# Altium PCB STM32F407_board.PcbDoc (part 2 of 3)
Units mm, origin at the board's own origin, x right, y up, seen from the top; angles counter-clockwise.
Board outline 72.6 x 74.6 mm, 4 copper layers (Top Layer, GND, PWR, Bottom Layer), stack 1.564 mm thick; 188 components, 143 nets, 738 pads, 406 vias.
Unrouted connection lines stored in the file: 4.
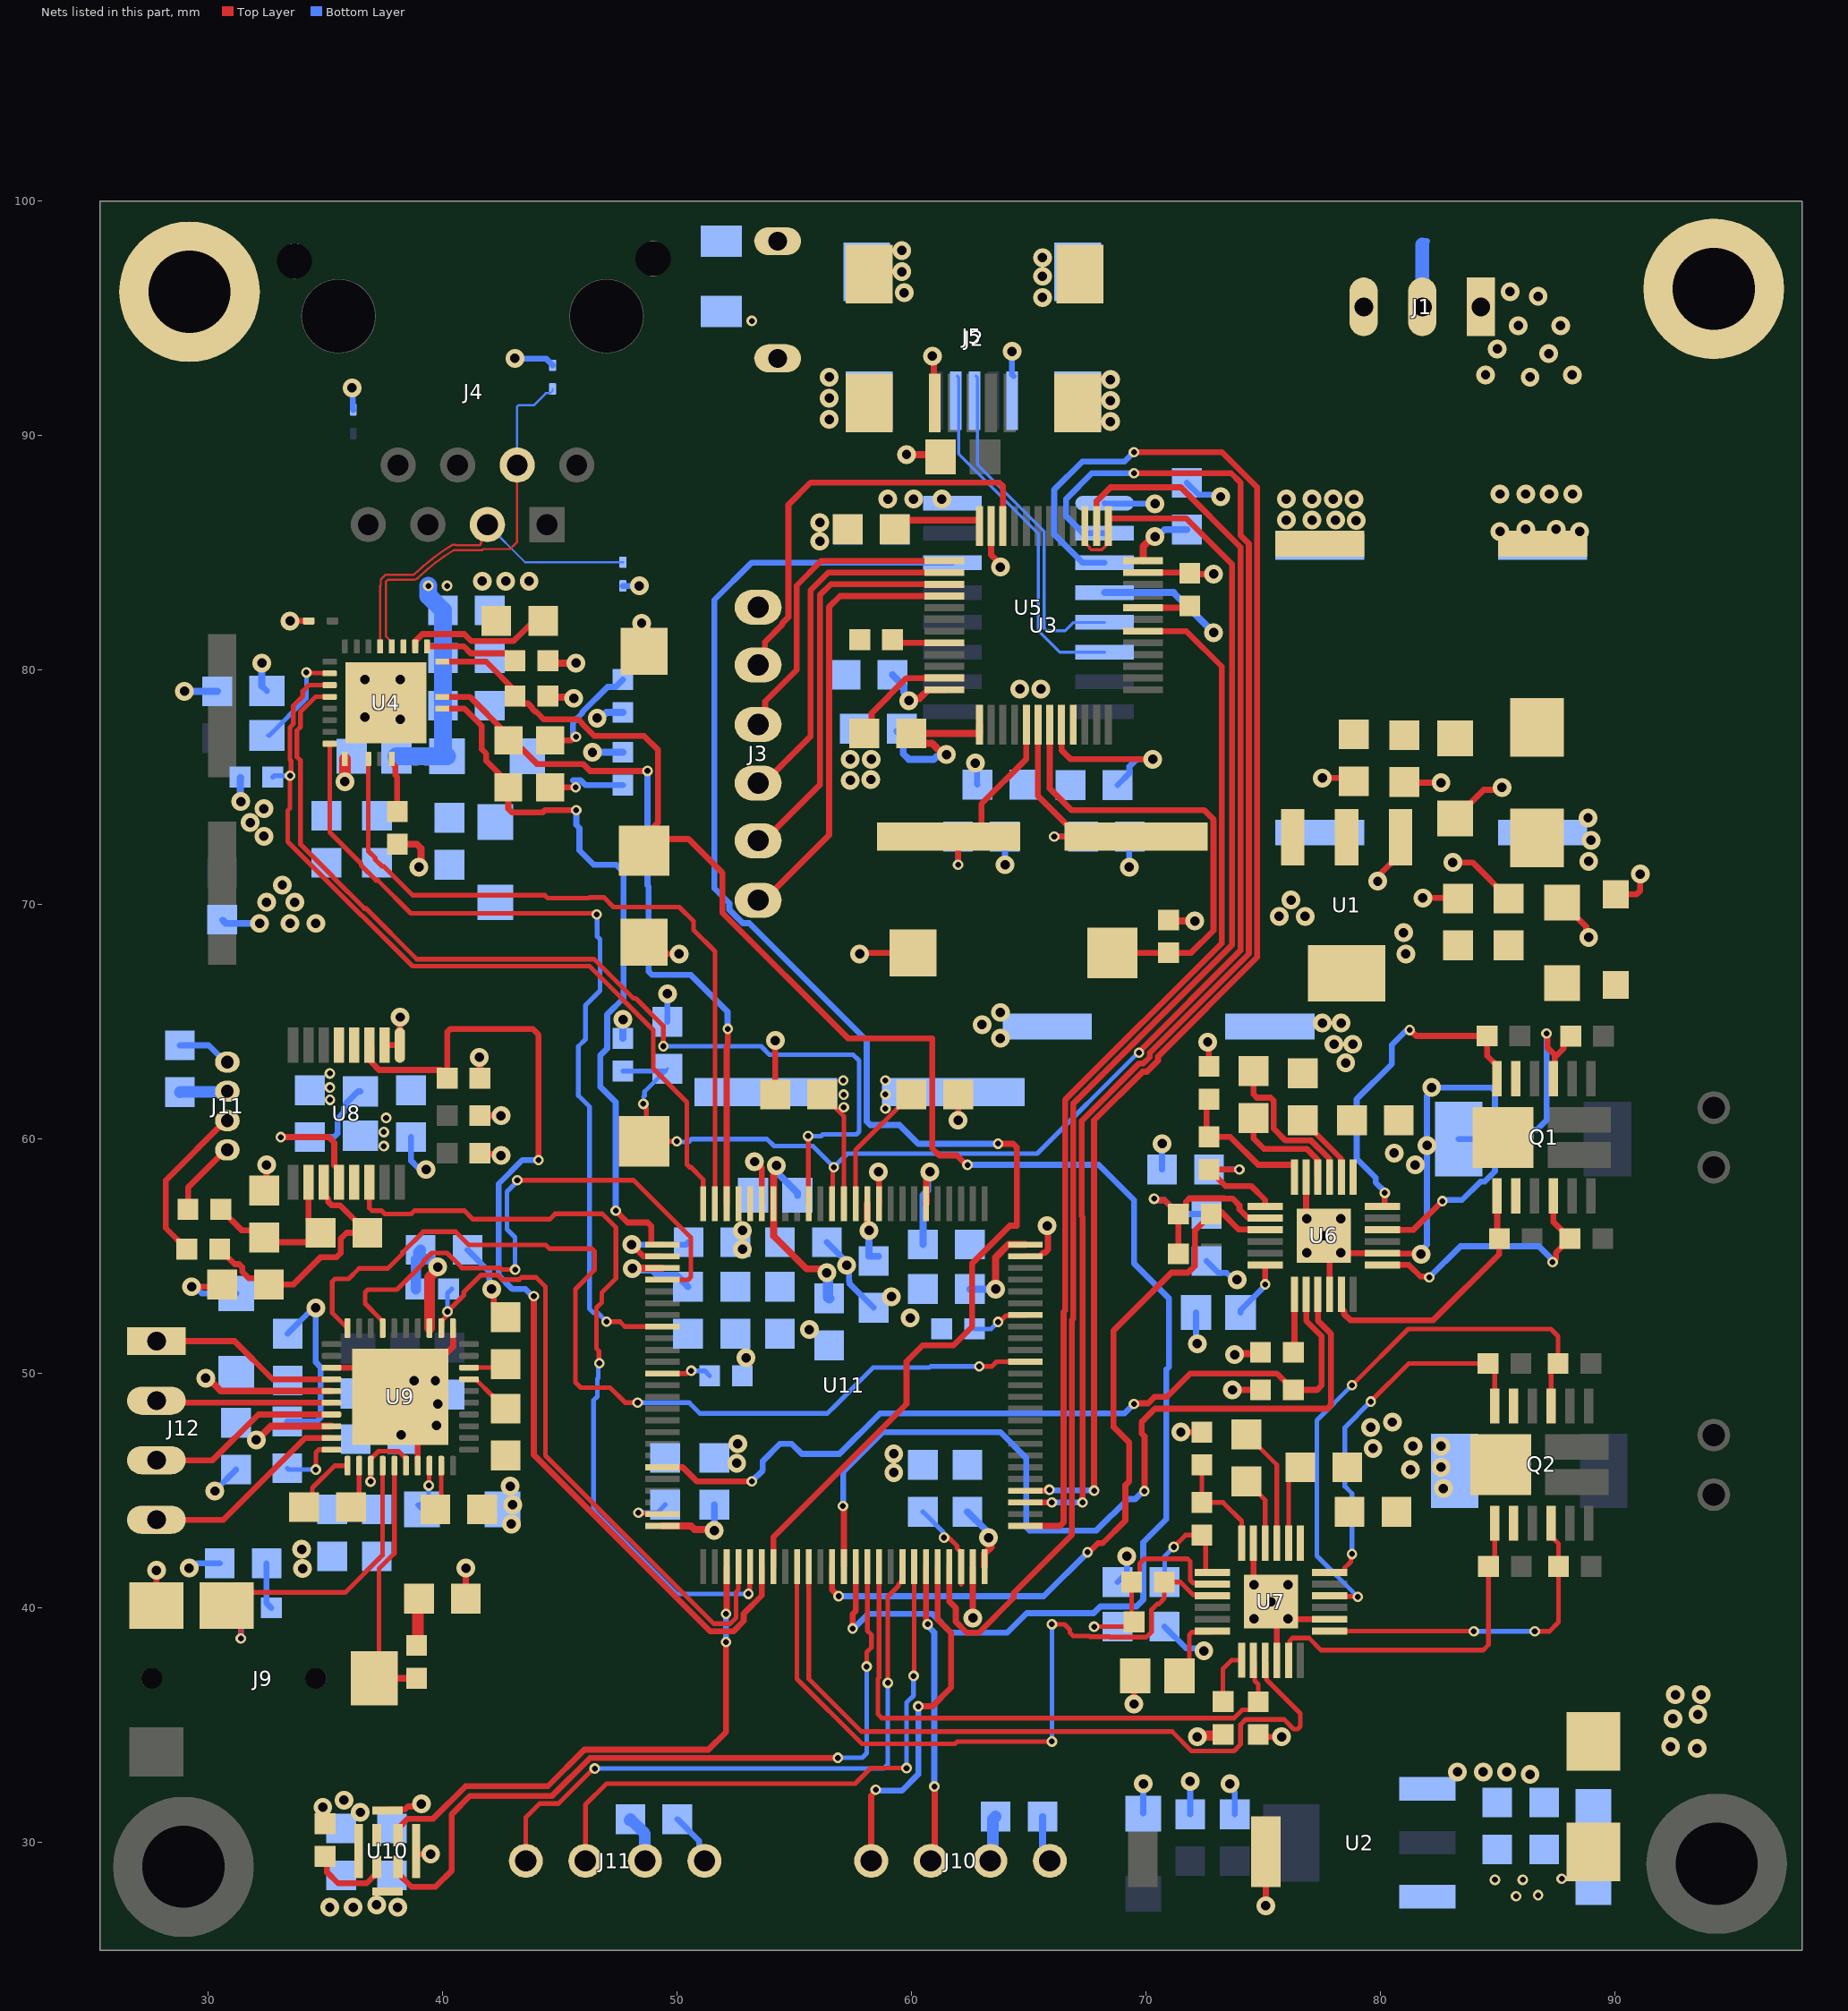
[diagram p4: the nets of this part, all layers, seen from the top]

## Via types
v1: diameter 0.8, hole 0.4, Top Layer to Bottom Layer, 257 vias
v2: diameter 0.45, hole 0.25, Top Layer to Bottom Layer, 149 vias

## Nets (pads, with @x,y where several pads share a name; then routed paths per layer and width w, separated by ;. In a path a pad name is that pad's centre, name@x,y a point inside that pad or via, vN(x,y) a via of type N, cw(c..) or ccw(c..) an arc to the next point about the centre after c; other vN are vias at no path point) (continued)
+3V3: C4.2 C5.2 C6.2 C16.2 C17.2 C19.2 C20.2 C22.2 C23.2 C24.2 C31.2 C32.2 C33.2 C34.2 C37.2 C46.2 C50.2 C65.2 C66.2 C67.2 C68.2 C69.2 C70.2 C78.2 C79.2 C80.2 C81.2 C82.2 C83.2 C90.2 C91.2 C92.2 D2.K FB1.1 FB2.1 FB4.1 J10.3 J11.3 R2.2 R4.2 R7.1 R8.2 R9.2 R12.2 R23.1 R35.1 R37.2 R38.2 R39.2 R42.2 R45.2 R47.2 U1.2 U1.4 U3.1 U3.9 U3.24 U3.36 U3.48 U4.17 U5.4 U5.16 U8.13 U9.5 U9.8 U9.33 U10.1 U11.6 U11.11 U11.19 U11.28 U11.50 U11.75 U11.100 | length 88.6
  Top Layer w0.125: C20.2@59.291,86.011 C20.2@59.68,86.4 ; U3.36@62.822,86.4 62.909,86.313 U3.36@62.909,86.153 ; v1@70.313,85.7 v1(70.4,85.7) ; R4.2@70.981,69.342 R4.2@71.023,69.3
  Top Layer w0.3: v1(29.9,49.8) 30.002,49.8 30.552,49.25 U9.5@35.265,49.25 ; v1(32.064,47.17) 32.106,47.17 32.686,47.75 U9.8@35.265,47.75 ; R8.2@38.075,72.577 38.908,72.577 39.084,72.401 39.084,71.684 v1(39,71.6) ; R37.2@41.599,59.4 41.649,59.35 42.45,59.35 v1(42.5,59.3) ; R39.2@41.599,62.6 v1@41.599,63.499 ; R38.2@41.799,61 v1(42.5,61) ; R9.2@44.499,80.4 44.599,80.3 v1(45.7,80.3) ; R7.1@44.528,79.1 44.778,78.85 45.55,78.85 v1(45.6,78.8) ; v1(48.1,54.479) 48.11,54.49 49.379,54.49 U11.28@49.389,54.5 ; U11.50@49.389,43.5 50.6,43.5 50.75,43.35 51.55,43.35 v1(51.6,43.3) ; v1(54.247,58.867) 54.247,58.732 54.127,58.612 54.127,55.873 55.535,54.465 v1@56.4,54.465 ; U11.11@58.127,57.238 58.127,56.173 v1(58.2,56.1) ; C20.2@59.68,86.4 U3.36@62.822,86.4 ; v1(59.8,89.2) R2.2@61.3,89.2 ; v1(59.9,78.7) 59.996,78.796 60.352,78.796 60.721,79.165 U3.48@61.421,79.165 ; C19.2@60,77.3 C19.2@60.1,77.3 ; C19.2@60,77.4 C19.2@60.1,77.3 ; U11.6@60.627,57.238 60.65,57.261 60.65,58.315 60.8,58.465 v1(60.8,58.6) ; v1(61.5,76.4) 61.365,76.4 60.885,76.879 60.485,76.879 60.3,77.064 C19.2@60.3,77.3 ; U3.1@62.909,77.677 62.909,77.3 C19.2@60.3,77.3 ; U11.75@63.127,41.762 63.127,42.327 63.404,42.604 63.404,42.904 v1@63.5,43 ; v1(63.6,53.6) 63.6,54.953 64.147,55.5 U11.100@64.865,55.5 ; U3.24@69.897,84.665 69.897,85.284 v1@70.313,85.7 ; R4.2@71.023,69.3 v1(72.1,69.3) ; v1(73.8,50.8) 73.85,50.85 74.852,50.85 R23.1@74.902,50.9 ; C19.2@60.1,77.3 C19.2@60.3,77.3
  Top Layer w0.45: U9.33@39.45,51.935 39.45,54.099 39.8,54.449 v1(39.8,54.544) ; v1(72.2,34.5) 72.252,34.552 73.249,34.552 R35.1@73.3,34.603
  Top Layer w0.5: v1(35.842,75.242) U4.17@35.842,76.213
  Bottom Layer w0.254: R12.2@31.369,75.438 R12.2@31.4,75.407
  Bottom Layer w0.3: v1(31.4,74.4) 31.385,74.416 31.385,75.392 R12.2@31.4,75.407 ; R47.2@47.701,64.299 v1@47.701,65.101 ; v1(48.1,54.479) 48.161,54.418 48.95,54.418 49.183,54.185 49.992,54.185 C82.2@50.477,53.7 ; v1(51.6,43.3) C81.2@51.6,44.4 ; v1(54.247,58.867) 54.343,58.771 54.343,58.507 55.15,57.7 FB4.1@55.15,57.6 ; v1(58.2,56.1) 58.2,55 C83.2@58.6,55 ; C16.2@59.2,79.8 59.685,79.315 59.685,79.05 59.9,78.835 v1(59.9,78.7) ; C17.2@59.4,77.4 59.657,77.143 59.657,76.438 59.895,76.2 60.965,76.2 61.069,76.304 61.269,76.304 61.3,76.335 v1@61.3,76.4 ; C92.2@60.5,55.5 60.5,57.6 60.704,57.804 60.704,58.504 v1(60.8,58.6) ; C79.2@62.4,44.1 63.204,43.296 63.204,43.096 v1(63.3,43) ; C78.2@62.5,53.6 v1(63.6,53.6) ; U5.4@68.25,83.31 71.19,83.31 v1(72.9,81.6) ; v1(70.4,85.7) 70.512,85.7 70.807,85.995 C24.2@71.755,85.995
  Bottom Layer w0.45: R42.2@38.87,53.6 38.872,53.602 38.872,54.861 39.011,55 39.117,55 39.256,54.861 39.483,54.861 v1(39.8,54.544) ; C70.2@38.972,55.169 C70.2@39.073,55.271 ; v1(56.4,54.3) 56.45,54.25 56.45,53.25 C80.2@56.5,53.2
  Bottom Layer w0.5: C46.2@28.8,62 28.817,62.017 30.808,62.017 J11.3@30.826,62.034 ; C91.2@47.978,30.944 C91.2@48.022,30.988 48.641,30.369 J11.3@48.641,29.21 ; J10.3@63.373,29.21 63.486,29.323 63.486,30.987 C90.2@63.6,31.1
  other v1: 36.5,31.281 34.9,31.5 35.8,31.8 41.574,63.488 47.701,65.101 81.1,67.9 81,68.8 32.385,72.914 31.8,73.5 32.385,74.09 64.632,79.2 65.532,79.2 59,87.3 60.1,87.3 61.3,87.3
  other v2: 37.5,59.7 37.5,60.3 37.6,60.9
+12V: C1.1 C2.1 C3.1 C39.1 C40.1 C41.2 C45.1 C47.2 D1.A D3.A J1.1 Q1.2 Q1.11 Q1.15 Q2.2 Q2.11 Q2.15 U6.1 U7.1
  other v1: 93.527,34.008 92.393,34.078 92.493,35.278 93.557,35.454 92.6,36.3 93.7,36.3 79.7,46.8 79.6,47.7 80.523,47.926 78.535,63.245 78.035,64.045 78.835,64.045 77.535,64.945 78.335,64.945 88.9,71.846 89,72.746 88.871,73.703 85.114,85.914 88.514,85.914 86.214,86.014 87.514,86.014 85.114,87.514 86.214,87.514 87.214,87.514 88.214,87.514 86.4,92.5 84.5,92.6 88.2,92.6 87.2,93.5 85,93.7 85.9,94.7 87.7,94.7 86.743,95.945 85.543,96.145
AIN0: J11.2@30.826,60.784 R40.2 | length 7.1
  Top Layer w0.254: R40.2@29.101,55.3 28.2,56.201 28.2,58.234 30.751,60.784 J11.2@30.826,60.784
  Bottom Layer w0.254: J11.2@30.826,60.693 J11.2@30.826,60.784
AIN1: J11.1@30.826,59.534 R41.2 | length 3.3
  Top Layer w0.254: R41.2@29.148,57 29.148,57.931 30.751,59.534 J11.1@30.826,59.534
  Bottom Layer w0.254: J11.1@30.751,59.534 J11.1@30.826,59.534
CAN_RX: J10.2 U11.70 | length 12.7
  Top Layer w0.254: U11.70@60.627,41.762 60.627,39.426 60.7,39.353 v2(60.7,39.3) ; J10.2@60.833,29.21 61,29.377 v2@61,32.343
  Bottom Layer w0.254: v2(60.7,39.3) 60.7,39.247 60.986,38.961 v2(60.986,32.386)
CAN_TX: J10.1 U11.71 | length 15.3
  Top Layer w0.254: J10.1@58.293,29.21 58.293,31.997 58.486,32.19 v2(58.486,32.243) ; v2(60.3,35.8) 60.306,35.806 60.906,35.806 61.7,36.6 61.7,38.939 61.127,39.512 U11.71@61.127,41.762
  Bottom Layer w0.254: v2@58.486,32.214 v2(58.486,32.243) ; v2@58.5,32.2 59.6,32.2 60.3,32.9 v2(60.3,35.8)
CH340_RST: U5.14 U11.57 | length 65.9
  Top Layer w0.254: U11.57@54.127,41.762 54.127,43.027 59.8,48.7 59.8,50.514 60.486,51.2 61.8,51.2 62.6,52 62.6,54.7 64.206,56.306 64.5,56.306 64.5,59.651 64.351,59.8 v2(63.7,59.8)
  Bottom Layer w0.254: U5.14@61.75,84.58 53.18,84.58 51.6,83 51.6,70.7 52.24,70.06 52.24,69.779 52.812,69.207 53.093,69.207 58.1,64.2 58.1,60.749 58.249,60.6 59.5,60.6 60.3,59.8 v2(63.7,59.8)
CH340_RXD: U5.3 U11.79 | length 63.2
  Top Layer w0.254: U11.79@64.865,45 65.8,45 65.839,45.039 v2(65.892,45.039) ; v2(67.8,45) 67.8,60.799 69.876,62.874 70.053,62.874 70.526,63.347 70.526,63.524 74.754,67.753 74.754,87.798 73.252,89.3 v2(69.5,89.3)
  Bottom Layer w0.254: v2(65.892,45.039) 65.912,45.02 67.78,45.02 v2(67.8,45) ; U5.3@68.25,84.58 67.318,84.58 66.1,85.798 66.1,87.7 67.3,88.9 69.1,88.9 v2(69.5,89.3)
CH340_TXD: U5.2 U11.78 | length 59.9
  Top Layer w0.254: U11.78@64.865,44.5 v2(66,44.5) ; v2(67.306,44.5) 67.306,56.68 67.27,56.715 67.27,60.77 69.729,63.228 69.907,63.228 70.172,63.493 70.172,63.671 74.4,67.899 74.4,85.401 74.046,85.755 74.046,88.005 73.651,88.4 v2(69.5,88.4)
  Bottom Layer w0.254: v2(66,44.5) v2(67.306,44.5) ; U5.2@68.25,85.85 67.318,85.85 66.608,86.56 66.608,87.308 67.7,88.4 v2(69.5,88.4)
CH340USB_D_N: J5.2 U5.6 | length 15.5
  Bottom Layer w0.125: J5.2@61.966,92.544 62.029,92.481 62.029,89.215 65.422,85.822 65.422,81.678 66.33,80.77 U5.6@68.25,80.77
CH340USB_D_P: J5.3 U5.5 | length 14.7
  Bottom Layer w0.125: J5.3@62.766,92.544 62.829,92.481 62.829,88.771 65.674,85.926 65.674,81.783 65.778,81.678 66.576,81.678 66.937,82.04 U5.5@68.25,82.04
CLK_MIC: U10.3 U11.65 | length 32.3
  Top Layer w0.2: v2(58.1,37.5) 58.1,38.112 58.3,38.312 58.3,38.857 58.127,39.03 U11.65@58.127,41.762
  Top Layer w0.254: U10.3@38.1,28.956 38.1,28.681 38.681,28.1 39.7,28.1 40.4,28.8 40.4,31.2 41.181,31.981 44.683,31.981 46.302,33.6 v2@56.8,33.6
  Bottom Layer w0.2: v2(56.873,33.605) 57.905,33.605 58.1,33.8 v2(58.1,37.5)
COL: DS1.A U4.28 U11.26 | length 31
  Top Layer w0.254: U4.28@39.992,78.363 40.937,78.363 41.675,77.625 41.675,76.628 41.864,76.439 41.864,76.136 DS1.A@42.7,75.3 ; DS1.A@42.811,75 42.811,74.089 42.973,73.927 44.266,73.927 44.364,74.025 v2(45.711,74.025) ; v2(47.395,56.946) 47.901,56.44 48.759,56.44 48.908,56.291 48.908,55.5 U11.26@49.389,55.5
  Bottom Layer w0.254: v2@45.6,74 45.625,74.025 v2(45.711,74.025) ; v2@45.641,73.966 45.679,73.966 45.711,73.934 45.711,73.403 45.847,73.267 45.847,72.312 46.46,71.7 47.418,71.7 47.727,71.391 47.727,66.014 47.029,65.315 47.029,63.864 46.729,63.564 46.729,62.239 47.395,61.572 v2(47.395,56.946)
CRS: DS2.A U4.29 U11.23 | length 30.9
  Top Layer w0.254: U4.29@39.992,78.863 41.165,78.863 42.69,77.338 44.028,76 46,76 46.3,75.7 v2(48.748,75.7) ; U11.23@52.127,57.238 52.127,63.967 52.175,64.015 v2(52.175,64.7)
  Bottom Layer w0.254: v2(48.748,75.7) 48.748,70.822 48.8,70.77 48.8,67.149 48.949,67 50.6,67 52.167,65.433 52.167,64.708 v2(52.175,64.7)
DOUT_MIC: U10.4 U11.53 | length 23.1
  Top Layer w0.254: U10.4@38.1,30.306 38.1,30.581 38.527,31.008 39.608,31.008 41,32.4 44.5,32.4 46.054,33.954 51.35,33.954 52.1,34.704 v2(52.1,38.546) ; v2(52.1,39.75) 52.127,39.777 U11.53@52.127,41.762
  Bottom Layer w0.254: v2(52.1,38.546) v2(52.1,39.75)
DRDY: U8.14 U11.55 | length 34.1
  Top Layer w0.2: U8.14@36.886,58.155 36.886,57.062 37.003,56.944 37.409,56.944 37.548,56.805 38.667,56.805 38.806,56.944 40.941,56.944 41.307,56.578 44.577,56.578 44.809,56.811 46.821,56.811 47.4,56.231 47.4,54.053 46.8,53.453 46.8,53.034 46.575,52.809 46.575,51.067 46.679,50.963 46.679,50.458 v2(46.7,50.438) ; v2(53.051,40.6) 53.051,40.668 53.108,40.724 53.108,41.743 U11.55@53.127,41.762
  Bottom Layer w0.2: v2(46.7,50.438) 46.652,50.39 46.652,49.81 46.615,49.772 46.615,49.019 46.45,48.854 46.45,44.15 50,40.6 v2(53.051,40.6)
DVDD: C43.2 R21.2 R22.2 U6.8 | length 9.9
  Top Layer w0.254: v2@70.4,57.5 70.504,57.396 70.806,57.396 R21.2@71.401,56.8 ; R22.2@71.401,55.249 R21.2@71.401,56.8 ; U6.8@75.097,56.63 75.074,56.653 74.353,56.653 74.003,57.002 74.003,57.169 73.712,57.46 73.348,57.46 73.337,57.472 71.868,57.472 71.719,57.323 71.719,57.118 R21.2@71.401,56.8
  Bottom Layer w0.254: v2@70.4,57.5 70.504,57.396 70.806,57.396 71.401,56.8 C43.2@72.6,56.8
  other v2: 70.358,57.453
DVDD_2: C49.2 R33.2 R34.2 U7.8 | length 9.6
  Top Layer w0.2: v2(67.8,39.2) 69.301,39.2 R34.2@69.501,39.4 69.401,39.5 R33.2@69.401,41.1 69.746,41.444 69.746,41.897 69.946,42.098 71.781,42.098 71.898,41.981 71.898,41.184 72.015,41.067 72.798,41.067 U7.8@72.848,41.017
  Bottom Layer w0.2: v2(67.8,39.2) C49.2@68.8,39.2
EARTH_GND: C25.1 J1.2 MH1.1 MH2.1 R10.1 | length 2.9
  Bottom Layer w0.254: 81.8,98.151 81.949,98.3 82,98.3
  Bottom Layer w0.6: J1.2@81.8,95.5 81.8,98.151
EN: R24.2 U6.14 U11.45 | length 35.4
  Top Layer w0.254: U11.45@49.389,46 50.251,46 50.851,45.4 v2(53.2,45.4) ; v2(69.5,48.7) 69.529,48.729 70.106,48.729 70.377,49 70.9,49 71.899,49.999 75.6,49.999 R24.2@76.299,49.3 77.321,49.3 77.5,49.479 77.5,51.6 76.855,52.245 76.855,53.368 U6.14@76.847,53.376
  Bottom Layer w0.254: v2(53.2,45.4) 53.669,45.869 53.669,46.269 54.4,47 54.9,47 55.332,46.568 56.943,46.568 58.675,48.3 69.1,48.3 v2(69.5,48.7)
EN_2: R36.2 U7.14 U11.66 | length 24.7
  Top Layer w0.2: U11.66@58.627,41.762 58.627,37.028 58.575,36.976 58.575,35.469 58.744,35.3 73.772,35.3 74.126,35.654 74.456,35.654 R36.2@74.8,35.999 74.8,36.743 74.648,36.895 74.648,37.713 U7.14@74.598,37.763
EXT_UART_RX: J11.2@46.101,29.21 U11.69 | length 25.5
  Top Layer w0.2: J11.2@46.101,29.21 46.101,31.601 47,32.5 57.6,32.5 58.269,33.169 v2(59.8,33.169) ; v2(60.1,37.1) 60.127,37.127 U11.69@60.127,41.762
  Bottom Layer w0.2: v2(59.8,33.169) 59.8,35.966 60.1,36.266 v2(60.1,37.1)
EXT_UART_TX: J11.1@43.561,29.21 U11.68 | length 26.9
  Top Layer w0.2: J11.1@43.561,29.21 43.561,31.061 44.154,31.654 44.954,31.654 46.448,33.148 v2(46.5,33.148) ; v2(59,36.8) 59,40.488 59.454,40.942 59.454,41.007 59.571,41.124 59.6,41.124 59.627,41.151 U11.68@59.627,41.762
  Bottom Layer w0.2: v2(46.5,33.148) 58.831,33.148 59,33.317 v2(59,36.8)
GH1: Q1.1 R15.2 U6.17 | length 11.3
  Top Layer w0.254: U6.17@78.347,53.376 78.347,52.776 78.47,52.653 78.47,52.532 78.729,52.273 82.273,52.273 85.076,55.076 85.076,55.739 R15.2@85.09,55.753 84.995,55.848 Q1.1@84.995,57.571
GH1_2: Q2.1 R27.2 U7.17 | length 15
  Top Layer w0.2: U7.17@76.098,37.763 76.148,37.813 76.148,38.596 76.265,38.713 76.969,38.713 77.482,38.2 84.4,38.2 84.626,38.426 R27.2@84.626,41.771 84.626,41.826 84.892,42.092 Q2.1@84.892,43.613
GH2: Q1.12 R16.2 U6.24 | length 14.5
  Top Layer w0.254: U6.24@80.097,57.13 80.177,57.13 80.2,57.153 v2(80.2,57.7) ; v2@81.2,64.6 81.348,64.6 81.548,64.4 R16.2@84.565,64.4 84.565,63.551 84.995,63.121 Q1.12@84.995,62.571
  Bottom Layer w0.254: v2(80.2,57.7) 80.2,57.753 79.812,58.141 79.812,58.349 79,59.161 79,61.701 80.5,63.201 80.5,64.016 81.084,64.6 v2@81.2,64.6
  other v2: 81.266,64.65
GH2_2: Q2.12 R28.2 U7.24 | length 16.3
  Top Layer w0.2: U7.24@77.848,41.517 78.448,41.517 78.498,41.567 78.498,41.712 78.752,41.967 78.752,42.252 v2(78.8,42.3) ; v2(79.6,48.8) 81.227,50.427 R28.2@84.609,50.427 84.892,50.144 84.892,49 84.792,48.9 84.892,48.8 Q2.12@84.892,48.613
  Bottom Layer w0.2: v2(78.8,42.3) 78.8,44.884 78.5,45.184 78.5,47.7 v2(79.6,48.8)
GL1: Q1.4 R17.2 U6.19 | length 11.7
  Top Layer w0.254: U6.19@80.097,54.63 81.228,54.63 81.72,54.138 82.062,54.138 v2(82.1,54.1) ; Q1.4@87.395,57.571 87.395,56.459 R17.2@88.101,55.753 87.504,55.156 87.504,54.904 v2@87.4,54.8
  Bottom Layer w0.254: v2(82.1,54.1) 83.427,55.427 86.773,55.427 v2@87.4,54.8
  other v2: 87.358,54.753
GL1_2: Q2.4 R29.2 U7.19 | length 14.3
  Top Layer w0.2: U7.19@77.848,39.017 77.856,39.009 83.991,39.009 v2(84,39) ; v2(86.6,39) 86.603,39.003 87.225,39.003 87.611,39.389 R29.2@87.611,41.771 87.611,42.744 87.292,43.063 Q2.4@87.292,43.613
  Bottom Layer w0.2: v2(84,39) v2(86.6,39)
GL2: Q1.9 R18.2 U6.22 | length 16
  Top Layer w0.254: U6.22@80.097,56.13 81.43,56.13 v2@82.7,57.4 ; v2(87.1,64.5) 87.138,64.462 87.138,63.904 87.395,63.646 ; Q1.9@87.395,62.571 87.456,62.632 87.456,63.491 87.82,63.856 87.82,64.072 R18.2@88.138,64.389
  Bottom Layer w0.254: v2@82.7,57.4 83.5,57.4 84.286,58.185 84.46,58.185 84.9,58.625 84.9,59 86.3,60.4 86.7,60.4 87.1,60.8 v2(87.1,64.5)
  other v2: 82.658,57.353
GL2_2: Q2.9 R30.2 U7.22 | length 24.6
  Top Layer w0.2: U7.22@77.848,40.517 77.871,40.494 79.028,40.494 v2(79.052,40.47) ; v2(78.8,49.5) 81.2,51.9 87.287,51.9 87.593,51.593 R30.2@87.593,50.427 87.292,50.126 Q2.9@87.292,48.613
  Bottom Layer w0.2: v2(78.8,49.5) 77.3,48 77.3,42.222 v2(79.052,40.47)
GND: 32.A C1.2 C2.2 C3.2 C4.1 C5.1 C6.1 C7.1 C8.1 C9.1 C10.1 C11.1 C12.1 C13.1 C14.1 C15.1 C16.1 C17.1 C18.1 C19.1 C20.1 C21.1 C22.1 C23.1 C24.1 C26.2 C27.1 C28.1 C29.1 C30.1 C31.1 C32.1 C33.1 C34.1 C35.1 C36.1 C37.1 C40.2 C41.1 C42.1 C43.1 C46.1 C47.1 C48.1 C49.1 C50.1 C51.1 C53.2 C54.2 C56.1 C57.1 C58.1 C59.1 C60.1 C61.1 C62.2 C64.1 C65.1 C66.1 C67.1 C68.1 C69.1 C70.1 C71.2 C72.2 C73.2 C74.2 C75.1 C76.2 C77.2 C78.1 C79.1 C80.1 C81.1 C82.1 C83.1 C84.1 C85.1 C86.1 C87.1 C88.1 C89.1 C90.1 C91.1 C92.1 D2.A D4.A D5.A D6.A D7.A J1.3 J2.5 J2.6 J3.6 J5.5 J5.6 J9.1 J10.4 J11.4 R1.2 R3.1 R5.2 R6.2 R11.1 R14.2 R19.1 R20.1 R24.1 R26.2 R31.1 R32.1 R36.1 R46.1 R48.2 SW1.1 SW2.1 SW3.1 U1.1 U2.1 U3.8 U3.23 U3.35 U3.47 U4.33 U5.1 U6.5 U6.16 U6.20 U6.25 U7.5 U7.16 U7.20 U7.25 U8.1 U8.2 U8.4 U8.5 U9.3 U9.17 U9.31 U9.41 U10.5 U11.10 U11.20 U11.27 U11.74 U11.99 | length 170
  Top Layer w0.254: J9.1@27.8,40.1 v1(27.8,41.6) ; v1(29.3,53.7) 30.5,53.7 C53.2@30.6,53.8 ; C54.2@32.4,57.8 32.5,57.9 v1(32.5,58.9) ; v1(33.5,82.1) D6.A@34.295,82.1 ; U9.3@35.265,50.25 36.95,50.25 U9.41@38.2,49 ; U8.2@37.536,64.005 U8.1@38.186,64.005 38.193,64.012 38.193,65.193 v1(38.2,65.2) ; U10.5@37.65,31.356 37.698,31.404 38.414,31.404 38.541,31.531 38.996,31.531 v1(39.1,31.635) ; U9.41@38.6,49.4 40.123,50.923 40.239,50.923 40.45,51.134 U9.31@40.45,51.935 ; v1(38.8,49.7) 38.8,49.6 U9.41@38.2,49 ; U10.5@38.875,29.631 38.875,29.548 38.923,29.5 v1(39.5,29.5) ; U9.17@38.95,46.065 38.95,48.25 U9.41@38.2,49 ; C59.1@41,40.4 v1(41,41.7) ; C73.2@41.345,44.556 C73.2@41.7,44.2 ; v1(42.1,53.6) 42.192,53.508 42.192,52.908 C72.2@42.7,52.4 ; C71.2@42.696,45.996 C71.2@42.7,45.992 ; v1(48.075,55.5) 48.575,55 U11.27@49.389,55 ; v1(48.5,82) 48.5,80.9 SW2.1@48.6,80.8 ; SW3.1@48.6,68.4 49.1,67.9 v1(50.1,67.9) ; v1@53.391,59.009 53.627,58.773 U11.20@53.627,57.238 ; C77.2@54.2,61.9 v1(54.2,64.2) ; v1(57.8,67.9) 57.845,67.945 SW1.1@60.08,67.945 ; C19.1@58,77.3 58.308,77.608 58.308,78.167 59.806,79.665 U3.47@61.421,79.665 ; v1(58.6,58.6) 58.627,58.573 U11.10@58.627,57.238 ; v1(60.9,93.4) 60.966,93.334 J2.5@60.966,92.583 ; v1(62,60.8) C76.2@62,61.9 ; v1(62.627,39.573) U11.74@62.627,41.762 ; U3.35@63.409,86.153 63.409,84.922 63.8,84.531 v1(63.8,84.4) ; U11.99@64.865,55 65.476,55 65.622,55.146 65.697,55.146 65.83,55.279 65.83,56.27 v1(65.8,56.3) ; U3.8@66.409,77.677 66.409,76.591 66.8,76.2 v1(70.3,76.2) ; v1(69.5,35.9) 69.5,37.05 R31.1@69.55,37.1 ; U3.23@69.897,84.165 71.854,84.165 R3.1@71.882,84.137 71.919,84.1 v1(72.9,84.1) ; v1(71.501,47.499) R26.2@72.4,47.499 ; R14.2@72.7,63.1 v1@72.7,64.1 ; v1(73.7,49.3) 74.702,49.3 R24.1@74.902,49.1 ; U7.25@74.598,41.017 U7.5@74.598,42.767 ; R36.1@74.8,34.602 74.902,34.5 v1(75.8,34.5) ; v1(75.125,27.3) D4.A@75.125,29.6 ; v1(75.348,40.267) 75.598,40.017 U7.16@75.598,37.763 ; U7.25@76.098,39.517 U7.20@77.848,39.517 ; U6.5@76.847,58.38 76.847,56.63 v1(76.872,56.605) ; v1(77.536,75.4) 78.74,75.4 C9.1@78.878,75.262 ; v1(77.597,55.88) 77.847,55.63 U6.16@77.847,53.376 ; U6.25@78.347,55.13 U6.20@80.097,55.13 80.117,55.11 81.731,55.11 v1(81.751,55.091) ; v1(79.9,71) 80.004,71.104 80.004,71.303 80.772,72.071 U1.1@80.772,72.771 ; C8.1@81.037,75.23 81.067,75.2 v1(82.6,75.2) ; v1(81.822,70.283) 83.301,70.283 C4.1@83.323,70.261 ; v1(83.1,71.8) 83.943,71.8 C5.1@85.482,70.261 ; C7.1@83.2,73.671 84.425,74.896 85.096,74.896 v1(85.2,75) ; C6.1@87.763,70.086 88.796,69.054 88.796,68.704 v1(88.9,68.6) ; D2.A@90.06,70.436 90.936,70.436 91.1,70.6 v1@91.1,71.2
  Bottom Layer w0.254: C46.1@28.8,64 30.035,64 30.751,63.284 J11.4@30.826,63.284 ; v1(29.2,41.7) 29.348,41.7 29.548,41.9 C62.2@30.5,41.9 ; v1(29.3,53.7) 29.448,53.7 29.733,53.414 C66.1@31.205,53.414 ; v1@30.336,45.036 C65.1@31.2,45.9 ; C36.1@30.607,69.358 C36.1@30.665,69.3 ; R11.1@32.3,79.328 R11.1@32.512,79.116 ; C64.1@33.384,47.959 34.651,47.959 34.8,48.107 34.8,50.28 34.6,50.48 v1(34.6,52.8) 34.5,52.8 C69.1@33.4,51.7 ; v1(36.143,92.046) 36.177,92.012 36.177,91.128 D7.A@36.2,91.105 ; C50.1@38.664,60.084 38.664,59.068 38.927,58.804 39.196,58.804 v1(39.3,58.7) ; C70.1@41.073,55.271 41.996,54.349 41.996,53.704 v1(42.1,53.6) ; v1(43.097,93.303) 43.107,93.293 44.413,93.293 32.A@44.7,93.005 ; v1(46.6,77.958) v1@46.748,77.958 ; D5.A@47.7,83.595 v1(48.4,83.595) ; v1(48.075,55.5) 50.4,55.5 C88.1@50.5,55.6 ; C75.1@49.6,65 v1(49.6,66.2) ; C91.1@50.022,30.988 50.952,30.058 50.952,29.439 J11.4@51.181,29.21 ; C89.1@56.4,55.6 57.243,54.757 v1(57.243,54.616) 57.347,54.512 57.347,53.944 57.362,53.929 57.362,53.838 C83.1@58.4,52.8 ; v1(62.732,76.039) v1@62.793,76.1 ; v1@62.8,76 62.8,75.143 C23.1@62.822,75.121 ; C18.1@63.992,72.898 64,72.89 v1(64,71.7) ; v1(64.3,93.6) 64.3,92.61 J5.5@64.366,92.544 ; J10.4@65.6,29.847 65.913,29.534 J10.4@65.913,29.21 ; U5.1@68.25,87.12 68.26,87.11 70.39,87.11 v1(70.4,87.1) ; C48.1@68.8,41.1 69.2,41.5 v1(69.2,42.2) ; C22.1@68.8,75.1 69.306,75.606 69.306,75.894 69.612,76.2 v1(70.3,76.2) ; v1(69.3,71.6) 69.3,72.872 C21.1@69.326,72.898 ; C12.1@69.9,31.229 v1(69.9,32.5) ; C42.1@70.7,58.7 v1(70.7,59.8) ; C49.1@70.8,39.2 71.726,38.274 72.38,38.274 v1(72.484,38.17) ; C24.1@71.755,87.995 72.263,87.487 73.113,87.487 v1(73.2,87.4) ; C11.1@71.9,31.2 v1(71.9,32.6) ; v1@72.15,51.45 R19.1@72.15,52.6 ; C43.1@72.6,54.8 73.108,54.292 73.46,54.292 73.752,54 v1(73.9,54) ; v1(73.6,32.5) 73.6,32.352 73.8,32.152 C10.1@73.8,31.2 ; v1(81.751,55.091) 81.751,55.239 82,55.488 82,61.852 82.2,62.052 v1(82.2,62.2) 84.751,62.2 84.9,62.051 84.9,60.254 84.646,60 R20.1@83.35,60
  Bottom Layer w0.3: v1(29,79.1) C35.1@30.4,79.1 ; C36.1@30.665,69.3 30.765,69.2 v1(32.2,69.2) ; R11.1@32.3,79.328 v1(32.3,80.3) ; v1(46.4,76.5) R5.2@47.7,76.499 ; v1@46.748,77.958 46.99,78.2 R6.2@47.699,78.2 ; J10.4@65.6,29.847 C90.1@65.6,31.1
  other v1: 35.195,27.234 36.195,27.234 38.095,27.234 37.195,27.334 86.4,32.9 83.3,33 84.4,33 85.4,33 74.623,39.542 76.073,39.542 74.623,40.992 76.073,40.992 34.039,41.676 34,42.5 42.939,43.576 43,44.4 30.296,44.986 82.7,45.1 42.889,45.192 59.256,45.772 81.3,45.9 82.6,46 52.556,46.172 59.256,46.572 81.4,46.9 82.6,46.9 52.6,47 38.239,47.376 39.739,47.776 39.8,48.7 39.7,49.7 52.956,50.672 72.2,51.274 55.656,51.872 59.956,52.372 59.156,53.272 76.872,55.155 78.322,55.155 78.322,56.605 81.5,58.9 53.314,59.035 80.6,59.4 82,59.727 72.646,64.132 63.8,64.3 63.025,64.879 63.8,65.4 33.5,69.2 34.6,69.2 75.7,69.5 76.8,69.5 32.5,70.1 33.7,70.1 76.2,70.2 33.172,70.834 91.1,71.3 57.4,75.3 58.276,75.336 57.4,76.2 58.3,76.2 38.2,77.9 36.7,78 36.7,79.6 38.2,79.6 41.7,83.8 42.7,83.8 43.7,83.8 56.1,85.5 56.1,86.3 78.981,86.387 76,86.4 77.1,86.4 78.1,86.4 78.881,87.287 76,87.3 77.1,87.3 78,87.3 68.5,90.6 56.5,90.7 68.5,91.5 56.5,91.6 68.5,92.4 56.5,92.5 65.6,95.9 59.7,96.1 65.6,96.8 59.6,97 65.6,97.6 59.6,97.9
  other v2: 35.209,61.671 35.2,62.2 35.2,62.8
INT: R8.1 U4.21 | length 2.3
  Top Layer w0.254: U4.21@37.842,76.213 37.842,76.042 37.99,75.894 37.99,75.523 38.075,75.439 R8.1@38.075,73.974
JTCK/SWCLK: J3.4 U3.37 | length 13.4
  Top Layer w0.254: J3.4@53.467,77.684 53.766,77.983 53.766,78.666 55.113,80.013 55.113,83.613 56.165,84.665 U3.37@61.421,84.665
JTCK_F407: U3.18 U11.76 | length 45
  Top Layer w0.254: U11.76@64.865,43.5 66.351,43.5 66.5,43.649 66.5,52.625 66.562,52.687 66.562,61.663 73.246,68.347 73.246,80.154 71.735,81.665 U3.18@69.897,81.665
JTDI: J3.3 U3.38 | length 15.3
  Top Layer w0.125: J3.3@53.467,75.184 J3.3@53.717,75.184
  Top Layer w0.254: J3.3@53.717,75.184 55.7,77.167 55.7,83.4 56.465,84.165 U3.38@61.421,84.165
JTDO: J3.2 U3.39 | length 17.2
  Top Layer w0.125: J3.2@53.467,72.724 J3.2@53.717,72.724
  Top Layer w0.254: J3.2@53.717,72.724 56.1,75.107 56.1,83.2 56.565,83.665 U3.39@61.421,83.665
JTMS/SWDIO: J3.5 U3.34 | length 18.7
  Top Layer w0.254: J3.5@53.467,80.224 53.762,80.519 53.762,81.206 54.5,81.944 54.5,82 54.759,82.259 54.759,87.059 55.7,88 63.76,88 63.909,87.851 U3.34@63.909,86.153
JTMS_F407: U3.25 U3.27 U11.72 | length 63.2
  Top Layer w0.125: U3.27@67.409,86.153 67.496,86.066 67.496,85.351 67.596,85.251 67.596,85.221 67.677,85.14 68.126,85.14 68.322,85.336 68.322,86.066 U3.25@68.409,86.153 U3.25@68.409,86.613
  Top Layer w0.254: U11.72@61.627,41.762 61.627,40.273 61.9,40 61.9,39.413 62.367,38.946 62.887,38.946 64.373,40.432 64.373,40.636 66.854,43.117 66.854,52.286 66.916,52.348 66.916,61.516 73.692,68.292 73.692,84.508 71.727,86.473 68.432,86.473 68.409,86.45 U3.25@68.409,86.153
LRCK: U9.40 U11.90 | length 41.3
  Top Layer w0.2: U9.40@35.95,51.935 35.3,52.585 35.3,53.919 35.417,54.036 36,54.036 36.444,54.48 37.682,54.48 38.3,55.099 38.3,55.165 39.179,56.044 39.325,56.044 ; 39.325,56.045 40.568,56.045 41.124,55.488 44.403,55.488 44.568,55.323 46.383,55.323 46.5,55.206 46.5,54.426 45.675,53.601 45.675,49.625 45.9,49.4 47.156,49.4 47.797,48.759 v2(48.329,48.759) ; v2(62.898,50.302) 63.44,50.302 63.638,50.5 U11.90@64.865,50.5
  Bottom Layer w0.2: v2(48.329,48.759) 50.522,48.759 50.626,48.656 50.981,48.3 56.426,48.3 56.781,48.656 58.376,50.25 60.776,50.25 60.828,50.302 v2(62.898,50.302)
MCLK: U9.37 U11.29 | length 26
  Top Layer w0.2: U9.37@37.45,51.935 37.45,52.23 37.336,52.344 37.334,52.344 36.7,52.978 36.7,53.463 36.817,53.58 38.054,53.58 39.2,54.726 39.2,54.793 39.551,55.144 39.698,55.144 ; 39.698,55.145 40.195,55.145 40.84,54.5 42.473,54.5 42.54,54.433 v2(43.1,54.433) ; v2(43.193,58.245) 48.155,58.245 50.6,55.8 50.6,54.117 50.483,54 U11.29@49.389,54 ; U11.29@49.389,54 49.362,53.973 48.751,53.973 48.778,54 U11.29@49.389,54
  Bottom Layer w0.2: v2(43.1,54.433) 43.1,55.812 42.753,56.159 42.753,57.753 v2@43.2,58.2
MDC: U4.12 U11.16 | length 43.6
  Top Layer w0.2: U4.12@35.192,78.863 34.592,78.863 33.942,78.213 33.942,77.575 33.792,77.425 33.792,76.301 33.942,76.151 33.942,72.582 35.33,71.194 35.33,71.18 36.677,69.833 36.748,69.833 38.906,67.675 46.474,67.675 48.149,66 48.249,66 49.425,64.824 v2(49.425,63.96) ; v2(55.6,60.125) 55.614,60.112 55.614,57.252 U11.16@55.627,57.238
  Bottom Layer w0.2: v2(49.425,63.96) 53.592,63.96 53.951,63.6 57.519,63.6 57.773,63.346 57.773,60.317 57.656,60.2 56.225,60.2 56.15,60.125 v2(55.6,60.125)
MDIO: R12.1 U4.11 U11.25 | length 36
  Top Layer w0.2: U4.11@35.192,79.363 34.3,79.363 34.044,79.107 34.044,78.89 33.642,78.488 33.642,77.7 33.492,77.55 33.492,76.176 33.543,76.125 33.543,75.543 v2(33.5,75.5) 33.5,74.109 33.4,74.009 33.4,72.686 36.553,69.533 36.567,69.533 38.725,67.375 46.276,67.375 49,64.651 49,63 50.425,61.575 50.425,58.917 50.542,58.8 50.6,58.8 51.127,58.273 U11.25@51.127,57.238
  Bottom Layer w0.2: R12.1@32.766,75.438 32.828,75.5 v2(33.5,75.5)
NetC7_2: C7.2 C8.2 C9.2 D1.K U1.3
NetC13_2: C13.2 C14.2 C15.2 D3.K U2.3
  other v2: 85.8,27.7 86.746,27.746 84.9,28.4 86.09,28.402 87.746,28.446
NetC18_2: C18.2 U3.5 X2.2 | length 7.6
  Top Layer w0.125: X2.2@61.595,72.898 X2.2@62,72.493
  Top Layer w0.254: v2(62,71.7) X2.2@62,72.493 ; X2.2@63,73.435 63,74.3 64.909,76.209 U3.5@64.909,77.677
  Bottom Layer w0.125: C18.2@61.992,72.898 C18.2@62,72.89
  Bottom Layer w0.254: v2(62,71.7) C18.2@62,72.89
NetC21_2: C21.2 U3.6 X2.1 | length 10.2
  Top Layer w0.254: U3.6@65.409,77.677 65.409,74.636 X2.1@67.147,72.898 ; v2(66.1,72.9) 67.145,72.9 X2.1@67.147,72.898 ; X2.1@69.595,72.898 X2.1@67.147,72.898
  Bottom Layer w0.254: v2(66.1,72.9) 67.324,72.9 C21.2@67.326,72.898
NetC25_2: C25.2 J4.9 J4.10 R10.2
  other v2: 53.2,94.9
NetC26_1: C26.1 U4.2 | length 6.5
  Top Layer w0.254: U4.2@38.842,81.013 38.842,81.241 39.141,81.54 40.934,81.54 41.236,81.238 43.029,81.238 43.174,81.383 43.183,81.383 C26.1@44.3,82.5
NetC27_2: C27.2 C28.2 C29.2 C30.2 FB1.2 U4.3 | length 9.8
  Bottom Layer w0.254: FB1.2@38.034,76.327 FB1.2@38.039,76.322 ; C27.2@40.021,76.496 C27.2@40.195,76.322
  Bottom Layer w0.762: FB1.2@38.039,76.322 C27.2@40.195,76.322 ; v2(39.4,83.6) 39.4,83.171 C30.2@40.021,82.55 C29.2@40.021,80.518 C28.2@40.021,78.486 ; C27.2@40.021,76.496 C28.2@40.021,78.486
  other v2: 40.2,83.6
NetC38_1: C38.1 U6.3 | length 6.8
  Top Layer w0.254: C38.1@74.6,62.9 74.6,61.911 74.749,61.762 75.329,61.762 75.462,61.629 75.462,60.938 75.464,60.936 75.464,60.445 75.971,59.938 76.887,59.938 76.911,59.938 77.061,59.938 77.824,59.175 77.824,58.403 U6.3@77.847,58.38
NetC38_2: C38.2 U6.4 | length 4.7
  Top Layer w0.254: C38.2@74.6,60.9 74.6,60.027 75.043,59.584 76.864,59.584 77.324,59.124 77.324,58.403 U6.4@77.347,58.38
NetC39_2: C39.2 U6.2 | length 3.1
  Top Layer w0.254: C39.2@76.7,60.8 78.324,59.176 78.324,58.403 U6.2@78.347,58.38
NetC42_2: C42.2 R13.1 U6.7 | length 5.9
  Top Layer w0.254: v2(74,58.7) R13.1@72.7,58.7 73.4,58 74.5,58 75.097,57.403 U6.7@75.097,57.13
  Bottom Layer w0.254: C42.2@72.7,58.7 72.835,58.565 72.969,58.7 v2(74,58.7)
NetC44_1: C44.1 U7.3 | length 5.2
  Top Layer w0.2: C44.1@74.3,47.4 75.598,46.102 U7.3@75.598,42.767
NetC44_2: C44.2 U7.4 | length 3
  Top Layer w0.2: C44.2@74.3,45.4 75.098,44.602 U7.4@75.098,42.767
NetC45_2: C45.2 U7.2 | length 3.4
  Top Layer w0.2: U7.2@76.098,42.767 76.098,45.498 C45.2@76.6,46
NetC48_2: C48.2 R25.1 U7.7 | length 5
  Top Layer w0.2: v2(71.2,42.6) 71.702,43.102 R25.1@72.4,43.102 72.565,42.937 72.565,41.567 72.615,41.517 U7.7@72.848,41.517
  Bottom Layer w0.2: C48.2@70.8,41.1 70.811,41.111 70.811,42.211 v2(71.2,42.6)
NetC51_2: C51.2 FB2.2 U8.12 | length 8.8
  Top Layer w0.254: v2@33.101,60.084 35.151,60.084 35.388,59.847 35.388,58.878 35.586,58.68 U8.12@35.586,58.155
  Bottom Layer w0.254: v2@33.197,60.084 C51.2@34.345,60.084 34.349,60.087 35.379,60.087 35.527,60.236 35.527,60.878 35.799,61.149 35.799,61.328 35.881,61.411 35.881,61.511 36.404,62.034 FB2.2@36.504,62.034
  other v2: 33.106,60.084
NetC52_1: C52.1 C54.1 R41.1 U8.10 | length 7.4
  Top Layer w0.254: R41.1@30.545,57 31.437,56.108 31.892,56.108 32.4,55.6 34.4,55.6 C52.1@34.8,56 34.292,56.508 34.292,57.017 34.286,57.023 U8.10@34.286,58.155
NetC52_2: C52.2 C53.1 R40.1 U8.11 | length 11.4
  Top Layer w0.254: R40.1@30.498,55.3 31.137,54.662 31.329,54.662 31.462,54.529 31.462,54.337 31.733,54.066 32.334,54.066 C53.1@32.6,53.8 33.651,53.8 34.815,54.963 35.489,54.963 35.662,55.137 35.662,55.751 35.911,56 C52.2@36.8,56 35.622,57.178 35.266,57.178 35.134,57.311 35.134,57.432 34.936,57.63 U8.11@34.936,58.155
NetC56_2: C56.2 C57.2 C58.2 FB3.2 U9.13 U9.16 | length 3
  Top Layer w0.2: v2(36.934,45.39) 36.942,45.398 36.942,46.057 U9.13@36.95,46.065 36.95,46.36 37.275,46.685 38.125,46.685 38.45,46.36 U9.16@38.45,46.065
NetC59_2: C59.2 R43.2 | length 2
  Top Layer w0.5: R43.2@38.9,38.397 38.95,38.447 38.95,40.35 C59.2@39,40.4
NetC62_1: C62.1 R44.2 | length 2
  Bottom Layer w0.254: C62.1@32.5,41.9 32.5,40.2 R44.2@32.7,40
NetC63_1: C63.1 U9.11 | length 2.9
  Top Layer w0.2: C63.1@34.1,44.3 34.455,44.655 34.455,45.118 35.402,46.065 U9.11@35.95,46.065
NetC63_2: C63.2 U9.12 | length 1.9
  Top Layer w0.2: C63.2@36.1,44.3 36.45,44.65 U9.12@36.45,46.065
NetC64_2: C64.2 U9.10 | length 2.5
  Top Layer w0.2: v2@34.6,46.042 34.6,46.634 34.717,46.751 U9.10@35.264,46.751
  Bottom Layer w0.2: C64.2@33.384,45.959 33.443,45.9 v2(34.6,45.9)
NetC71_1: C71.1 U9.27 | length 2.1
  Top Layer w0.2: U9.27@41.135,49.75 41.43,49.75 42.145,49.035 42.165,49.035 C71.1@42.7,48.5
NetC72_1: C72.1 U9.28 | length 1.6
  Top Layer w0.2: U9.28@41.135,50.25 42.55,50.25 C72.1@42.7,50.4
NetC73_1: C73.1 U9.19 | length 2
  Top Layer w0.2: C73.1@39.7,44.2 39.95,44.45 U9.19@39.95,46.065
NetC74_1: C74.1 U9.18 | length 2.2
  Top Layer w0.2: v2(39.418,45.216) 39.434,45.232 39.434,46.049 U9.18@39.45,46.065
  Bottom Layer w0.2: C74.1@39.135,44.2 38.999,44.336 38.944,44.391 39.053,44.391 39.418,44.755 v2(39.418,45.216)
NetC76_1: C76.1 U11.12 X1.2 | length 5.6
  Top Layer w0.2: U11.12@57.627,57.238 57.627,59.527 C76.1@60,61.9
  other v2: 58.9,61.3 58.9,61.9 58.9,62.5
NetC77_1: C77.1 U11.13 X1.1 | length 5
  Top Layer w0.2: C77.1@56.2,61.9 57.127,60.973 U11.13@57.127,57.238
  other v2: 57.123,61.351 57.121,61.893 57.1,62.5
NetC84_2: C84.2 U11.73 | length 3.7
  Top Layer w0.2: v2@61.6,43 61.954,42.646 61.954,42.546 62.127,42.373 U11.73@62.127,41.762 62.127,41
  Bottom Layer w0.2: C84.2@60.5,44.1 61.352,43.248 61.352,43.048 v2(61.4,43)
NetC85_2: C85.2 U11.49 | length 2.3
  Top Layer w0.2: v2(48.363,44.063) 48.398,44.027 49.362,44.027 U11.49@49.389,44
  Bottom Layer w0.2: v2(48.363,44.063) 49.163,44.063 C85.2@49.5,44.4
NetC86_2: C86.2 C87.2 C88.2 C89.2 FB4.2 U11.21 U11.22
  other v1: 52.8,55.3 52.8,56.1
NetDS1_K: DS1.K R5.1 | length 3.3
  Top Layer w0.254: DS1.K@44.589,75 v2(45.687,75)
  Bottom Layer w0.254: 45.577,75.3 45.9,75.3 46.098,75.102 R5.1@47.7,75.102
NetDS2_K: DS2.K R6.1 | length 4.7
  Top Layer w0.254: DS2.K@44.6,77 45.485,77 45.645,77.161 v2(45.698,77.161)
  Bottom Layer w0.254: v2@45.567,77.161 45.567,77.767 45.973,78.173 45.973,78.218 47.045,79.289 47.391,79.289 R6.1@47.7,79.598
NetJ9_2: J9.2 R43.1 U9.15 | length 11.2
  Top Layer w0.2: J9.2@37.1,37 37.3,37.2 37.3,41.676 37.95,42.326 U9.15@37.95,46.065
  Top Layer w0.3: J9.2@37.1,37 R43.1@38.9,37
NetJ9_3: J9.3 R44.1 U9.14 | length 14.3
  Top Layer w0.2: v2(31.4,38.7) 31.4,39.5 J9.3@30.8,40.1 31.36,40.66 35.86,40.66 37.45,42.25 U9.14@37.45,46.065
  Bottom Layer w0.254: R44.1@31.303,40 31.4,39.903 v2(31.4,38.7)
NetR1_1: R1.1 U3.44 | length 2
  Top Layer w0.254: R1.1@59.497,81.3 59.632,81.165 U3.44@61.421,81.165
NetR3_2: R3.2 U3.20 | length 2
  Top Layer w0.125: R3.2@71.807,82.665 R3.2@71.882,82.74
  Top Layer w0.254: U3.20@69.897,82.665 R3.2@71.807,82.665
NetR9_1: R9.1 U4.1 | length 4
  Top Layer w0.254: U4.1@39.342,81.013 40.916,81.013 41.212,80.717 42.784,80.717 R9.1@43.102,80.4
NetR11_2: R11.2 U4.10 | length 4.4
  Top Layer w0.1: U4.10@35.174,79.881 U4.10@35.192,79.863
  Top Layer w0.2: v2(34.2,79.9) 34.219,79.881 U4.10@35.174,79.881
  Bottom Layer w0.1: R11.2@32.512,77.216 R11.2@32.612,77.216
  Bottom Layer w0.2: R11.2@32.612,77.216 34.2,78.804 v2(34.2,79.9)
NetR13_2: R13.2 R14.1 U6.6 | length 6.2
  Top Layer w0.254: R13.2@72.6,60.197 R14.1@72.6,61.703 ; R13.2@72.7,60.097 73.603,60.097 74.8,58.9 76.324,58.9 76.347,58.877 U6.6@76.347,58.38
NetR19_2: R19.2 U6.12 | length 2.4
  Top Layer w0.254: U6.12@75.097,54.63 75.1,54.627 v2@75.1,53.9
  Bottom Layer w0.254: R19.2@74.05,52.6 74.05,52.7 75.1,53.75 v2(75.1,53.8)
NetR23_2: R23.2 U6.13 | length 2.1
  Top Layer w0.254: R23.2@76.3,51.3 76.347,51.347 U6.13@76.347,53.38
NetR25_2: R25.2 R26.1 U7.6 | length 4.5
  Top Layer w0.2: R26.1@72.4,46.038 R25.2@72.4,44.499 73.301,44.499 74.098,43.702 U7.6@74.098,42.767
NetR31_2: R31.2 U7.12 | length 2.9
  Top Layer w0.2: R31.2@71.35,37.3 71.35,37.4 71.517,37.4 71.867,37.75 71.867,38.85 71.984,38.967 72.798,38.967 U7.12@72.848,39.017
NetR35_2: R35.2 U7.13 | length 2.3
  Top Layer w0.2: R35.2@73.3,36 73.3,37.4 73.667,37.767 U7.13@74.098,37.767
NetR45_1: R45.1 U10.2 | length 3.5
  Top Layer w0.254: R45.1@35,29.402 35.075,29.326 35.075,28.725 35.546,28.254 36.773,28.254 37.2,28.681 U10.2@37.2,28.956
NetR46_2: R46.2 U11.37 | length 2.1
  Top Layer w0.2: U11.37@49.389,50 50.432,50 50.548,50.115 v2(50.615,50.115)
  Bottom Layer w0.2: v2(50.615,50.115) 51.186,50.115 R46.2@51.401,49.9
NetR48_1: R48.1 U11.94 | length 2.4
  Top Layer w0.2: v2(63.7,52.2) 63.768,52.2 64.041,52.473 64.838,52.473 U11.94@64.865,52.5
  Bottom Layer w0.2: R48.1@62.698,51.9 63.4,51.9 v2(63.7,52.2)
nFAULT: R21.1 U6.9 U11.62 | length 32.7
  Top Layer w0.254: U11.62@56.627,41.762 56.627,40.773 v2(56.9,40.5) ; v2(67.525,42.372) 67.578,42.372 67.971,42.765 68.169,42.765 69.132,43.728 69.132,45.232 69.3,45.4 69.3,47.046 68.634,47.712 68.634,51.834 71.1,54.3 71.811,54.3 72.1,54.589 72.1,56.102 R21.1@72.798,56.8 ; R21.1@73.215,56.896 73.966,56.145 75.082,56.145 U6.9@75.097,56.13
  Bottom Layer w0.254: v2(56.9,40.5) 65.653,40.5 v2(67.525,42.372)
nFAULT_2: R33.1 U7.9 U11.59 | length 31.2
  Top Layer w0.2: U11.59@55.127,41.762 55.127,36.973 57.9,34.2 61.866,34.2 61.966,34.3 v2(66,34.3) ; v2(66,39.3) 66.532,39.3 66.764,39.068 66.764,38.942 66.91,38.796 67.602,38.796 67.624,38.775 68.47,38.775 68.49,38.756 70.029,38.756 70.254,38.981 70.254,39.927 70.491,40.164 70.561,40.164 70.798,40.402 R33.1@70.798,41.1 71.481,41.1 72.013,40.567 72.798,40.567 U7.9@72.848,40.517
  Bottom Layer w0.2: v2(66,34.3) v2(66,39.3)
NJTRST: J3.1 U3.40 | length 19
  Top Layer w0.125: J3.1@53.467,70.184 J3.1@53.717,70.184
  Top Layer w0.254: J3.1@53.717,70.184 56.5,72.967 56.5,82.7 56.965,83.165 U3.40@61.421,83.165
NRST: R4.1 SW1.2 U3.7 | length 19.7
  Top Layer w0.254: U3.7@65.909,77.677 65.909,74.951 66.837,74.023 72.506,74.023 72.892,73.637 72.892,68.892 71.945,67.945 R4.1@70.981,67.945 SW1.2@68.58,67.945
NRST_F407: C75.2 R47.1 SW3.2 U3.26 U11.14 | length 61.9
  Top Layer w0.2: v2(48.575,61.5) 48.575,61.432 48.7,61.307 48.7,60.875 49.1,60.475 SW3.2@49.1,60.4 ; SW3.2@48.6,59.9 v2(50,59.9) ; U11.14@56.627,57.238 56.654,57.265 56.654,58.754 v2(56.7,58.8)
  Top Layer w0.254: U3.26@67.909,86.153 67.909,87.209 68.5,87.8 71.5,87.8 74.046,85.254 74.046,68.046 69.72,63.72 v2(69.72,63.68)
  Bottom Layer w0.125: C75.2@49.502,62.902 C75.2@49.6,63
  Bottom Layer w0.2: R47.1@47.7,62.902 49.502,62.902 48.623,62.023 48.623,61.848 48.575,61.8 ; v2@50,59.825 50.048,59.873 50.498,59.873 50.625,60 53.844,60 54.144,59.7 55.8,59.7 v2(56.7,58.8) 57.275,59.375 65.375,59.375 69.68,63.68 v2(69.72,63.68)
OUTA+: J12.1 U9.4 | length 8.1
  Top Layer w0.254: J12.1@27.8,51.38 31.134,51.38 32.763,49.75 U9.4@35.265,49.75
OUTA-: J12.2 U9.6 | length 7.5
  Top Layer w0.254: J12.2@27.8,48.84 27.89,48.75 U9.6@35.265,48.75
OUTB+: J12.3 U9.7 | length 8.3
  Top Layer w0.254: J12.3@27.8,46.3 30.2,46.3 32.15,48.25 U9.7@35.265,48.25
OUTB-: J12.4 U9.9 | length 8.9
  Top Layer w0.254: J12.4@27.8,43.76 30.66,43.76 34.15,47.25 U9.9@35.265,47.25
PH: U6.15 U11.63 | length 38.1
  Top Layer w0.254: v2(57.086,44.343) 57.086,44.29 57.127,44.249 U11.63@57.127,41.762 ; v2(69.945,44.982) 69.954,44.992 69.954,47.317 69.827,47.444 69.827,47.927 70.4,48.5 77.752,48.5 77.901,48.649 77.901,51.7 77.356,52.245 77.356,53.367 U6.15@77.347,53.376
  Bottom Layer w0.254: v2@57.1,44.3 57.1,45.8 58.8,47.5 63.8,47.5 64.9,46.4 64.9,43.449 65.049,43.3 67.9,43.3 69.244,44.644 69.554,44.644 69.892,44.982 v2(69.945,44.982)
PH_2: U7.15 U11.60 | length 31.7
  Top Layer w0.2: U11.60@55.627,41.762 55.627,36.973 57.875,34.725 71.126,34.725 71.951,33.9 73.769,33.9 74.05,34.181 74.05,35.023 74.273,35.246 75.902,35.246 76.317,34.831 76.483,34.831 76.6,34.949 76.6,35.5 75.148,36.952 75.148,37.713 U7.15@75.098,37.763
PHY_RST: R7.2 SW2.2 U4.32 U11.64 | length 80.4
  Top Layer w0.254: U4.32@39.992,80.363 41.868,80.363 43.11,79.121 43.11,78.891 43.419,78.582 43.649,78.582 43.827,78.404 43.827,78.361 43.96,78.228 44.003,78.228 44.331,77.9 45.805,77.9 45.973,77.732 45.973,77.698 46.472,77.199 48.601,77.199 49.2,76.6 49.2,73.5 48.6,72.9 48.7,72.8 50.5,72.8 51.94,71.36 51.94,69.655 57.295,64.3 60.9,64.3 60.9,59.6 61.2,59.3 61.947,59.3 62.347,58.9 v2(62.4,58.9) ; v2(57.501,39.125) 57.501,39.732 57.627,39.858 U11.64@57.627,41.762
  Bottom Layer w0.254: v2(57.501,39.125) 57.554,39.125 58.181,39.752 60.887,39.752 61.693,38.946 64.097,38.946 64.924,39.773 67.782,39.773 68.071,40.062 69.613,40.062 69.9,40.349 69.9,42.8 70.874,43.774 70.874,50.157 71,50.282 71,53.2 69.5,54.7 69.5,57.4 68,58.9 v2(62.4,58.9)
RD_N: 32.K J4.6 U4.4 | length 16.2
  Top Layer w0.092: U4.4@37.842,81.013 37.842,81.188 37.592,81.438 37.592,83.779 37.667,83.855 38.226,83.855 38.75,83.855 ccw(c38.749,84.166) 38.966,83.943 cw(c44.925,77.851) 38.968,83.945 cw(c44.925,77.851) 40.488,85.126 40.502,85.112 41.691,85.112 41.747,85.167 42.726,85.167 42.887,85.167 43.19,85.471 J4.6@43.19,88.75
  Bottom Layer w0.092: J4.6@43.19,89.25 43.19,91.246 43.244,91.3 43.9,91.3 44.411,91.811 44.596,91.811 44.7,91.915 32.K@44.7,91.995
RD_P: D5.K J4.5 U4.5 | length 14.9
  Top Layer w0.092: U4.5@37.338,81.153 37.338,83.587 37.373,83.622 37.373,83.87 37.576,84.074 38.749,84.074 ccw(c38.749,84.166) 38.813,84.1 cw(c44.925,77.851) 38.815,84.102 cw(c44.925,77.851) 40.426,85.346 40.578,85.346 40.593,85.331 41.6,85.331 41.615,85.346 J4.5@41.92,86.21
  Bottom Layer w0.092: J4.5@41.92,86.21 43.525,84.605 D5.K@47.7,84.605
RESET: R39.1 U8.3 U11.56 | length 45.4
  Top Layer w0.254: U8.3@36.886,64.005 36.984,63.907 36.984,63.261 37.297,62.947 39.935,62.947 39.965,62.917 40.084,62.917 R39.1@40.202,62.8 ; R39.1@40.202,62.6 R39.1@40.202,62.8 ; R39.1@40.402,62.6 R39.1@40.202,62.8 ; v2(43.9,53.3) 43.9,46.531 51.433,38.998 52.411,38.998 52.852,39.439 52.852,39.752 53.627,40.527 U11.56@53.627,41.762 ; v2(44.1,59.1) 44.1,64.451 43.853,64.698 40.35,64.698 40.202,64.55 R39.1@40.202,62.8
  Bottom Layer w0.254: v2(43.9,53.3) 43.847,53.3 43.547,53.6 42.987,53.6 42.4,54.187 42.4,58.091 43.409,59.1 v2(44.1,59.1)
RESET_DAC: R42.1 U9.32 U11.54 | length 27.7
  Top Layer w0.2: U9.32@39.95,51.935 39.975,51.96 39.975,52.255 40.169,52.449 40.169,52.617 40.193,52.617 40.908,53.333 40.908,53.456 41.651,54.2 42.349,54.2 42.541,54.008 43.276,54.008 43.368,54.1 44,54.1 44.4,53.7 44.4,46.493 51.568,39.325 52.276,39.325 52.525,39.574 52.525,40.675 52.627,40.777 U11.54@52.627,41.762
  Bottom Layer w0.2: v2(40.217,52.641) 40.217,53.418 R42.1@40.398,53.6
RX_CLK: U4.19 U11.24 | length 31.5
  Top Layer w0.2: U4.19@36.842,76.213 36.842,72.284 37.13,71.996 37.13,71.926 37.423,71.633 37.494,71.633 38.726,70.4 44.363,70.4 44.488,70.275 46.25,70.275 46.284,70.31 46.885,70.31 47.294,69.9 50.107,69.9 50.713,69.294 50.713,68.914 51.627,68 U11.24@51.627,57.238
RX_D0: U4.16 U11.33 | length 37.6
  Top Layer w0.2: U4.16@35.192,76.863 35.192,73.086 36.53,71.748 36.53,71.677 37.174,71.033 37.245,71.033 38.653,69.625 46.544,69.625 v2(46.585,69.585) ; v2(47,52.212) 47.573,52.212 47.785,52 U11.33@49.389,52
  Bottom Layer w0.2: v2(46.585,69.585) 46.6,69.569 46.6,68.65 46.725,68.525 46.725,66.323 46.102,65.699 46.102,64.248 45.802,63.948 45.802,61.855 46.275,61.381 46.275,52.757 46.449,52.583 46.628,52.583 v2(47,52.212)